# Altium PCB MASTER.PcbDoc (part 2 of 2)
Units mm, origin at the board's own origin, x right, y up, seen from the top; angles counter-clockwise.
Board outline 70.52 x 68.97 mm, 2 copper layers (Top Layer, Bottom Layer); 64 components, 45 nets, 230 pads, 58 vias.
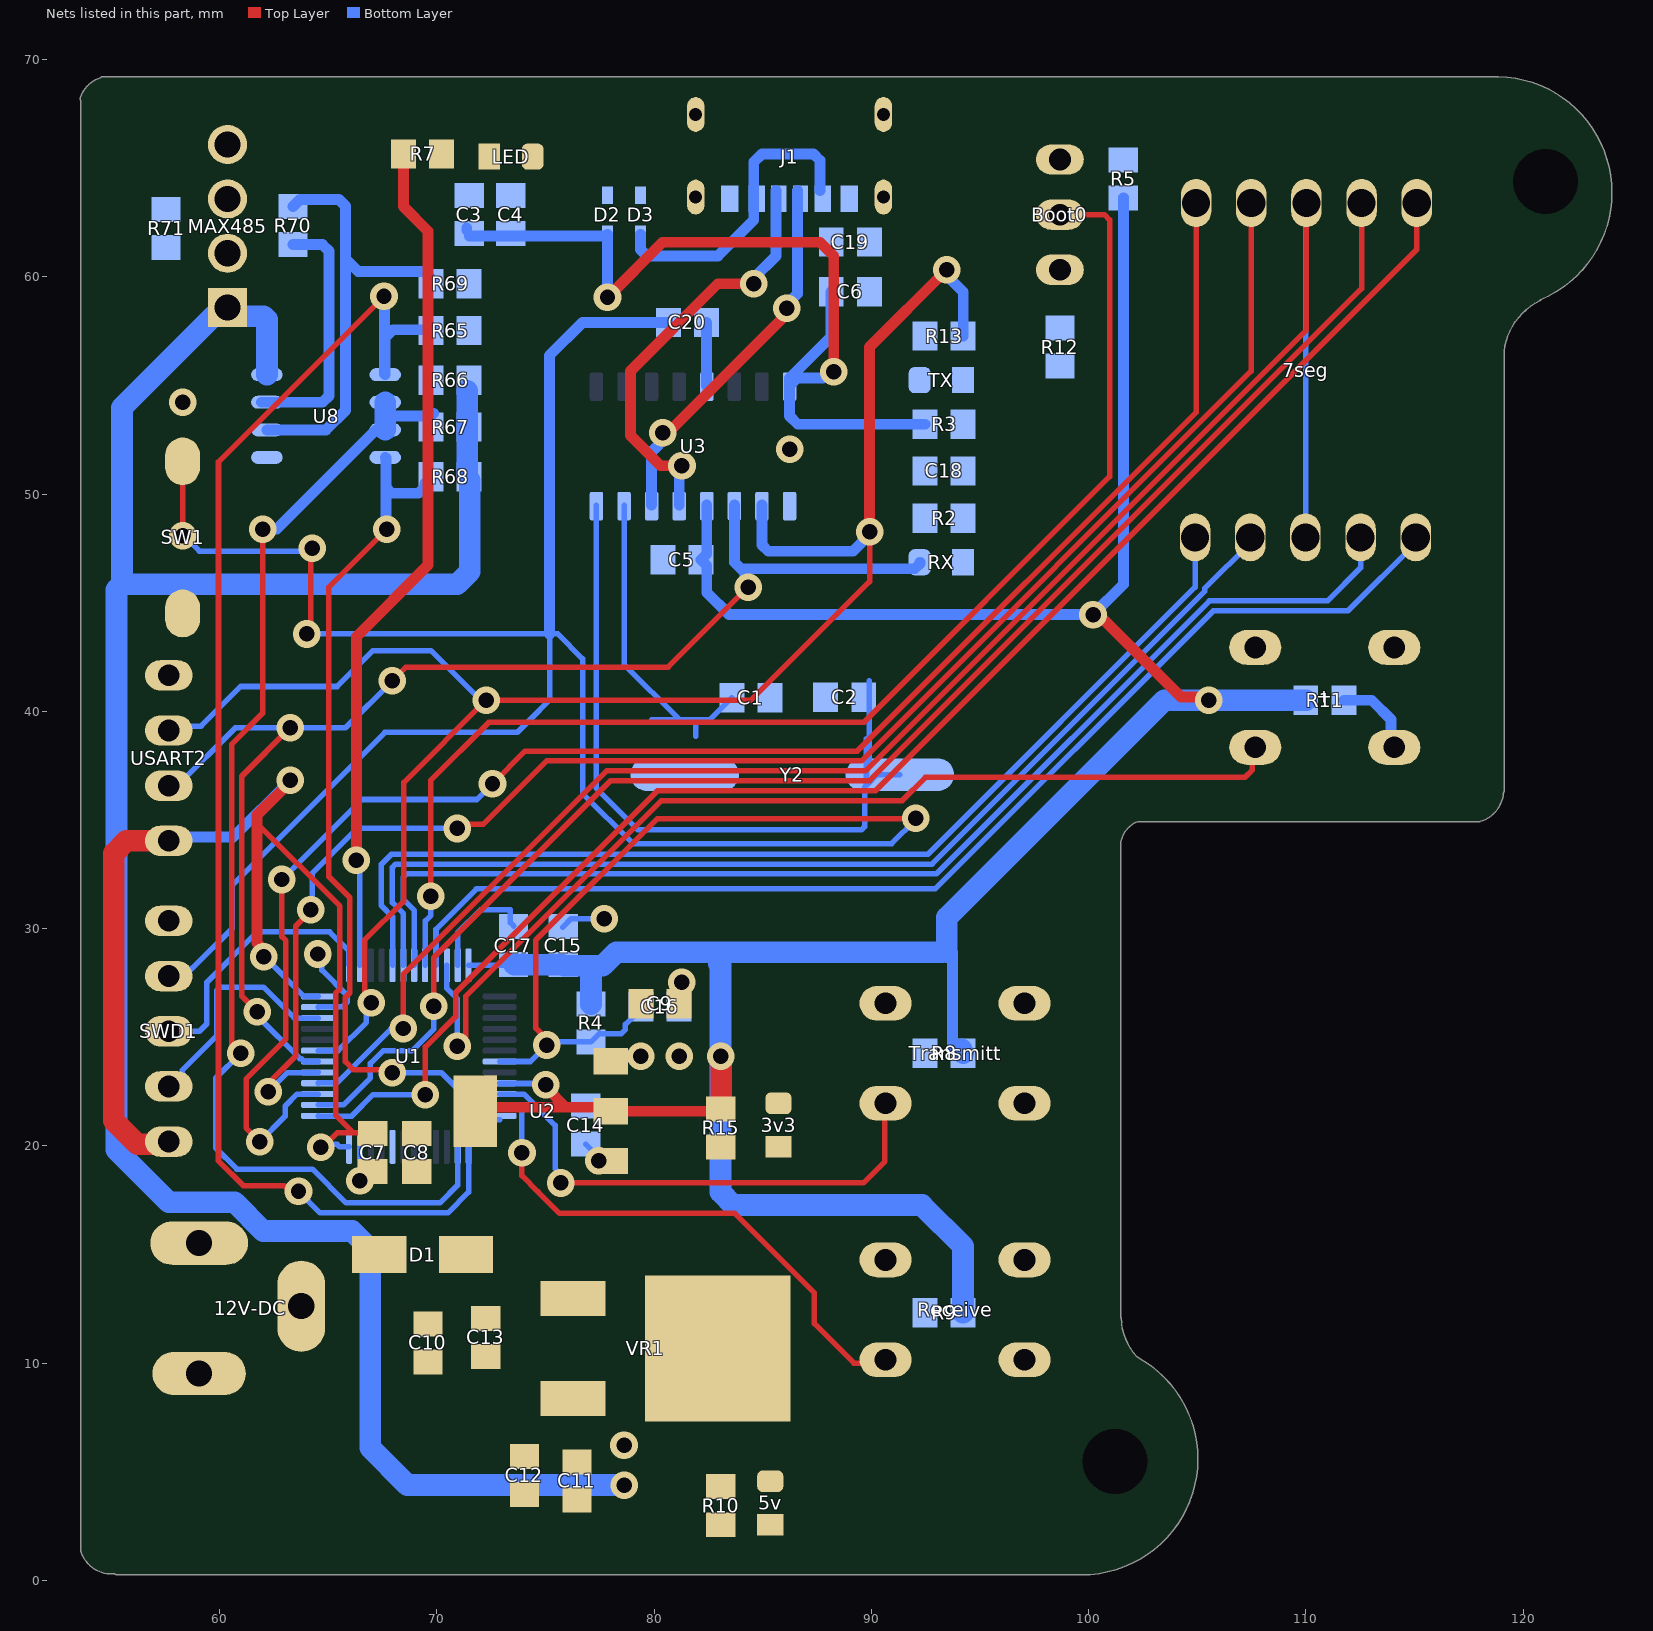
[diagram p2: the nets of this part, all layers, seen from the top]

## Part data
7seg: "file:///C:/Users/Tamana/Downloads/7SEG-12-19mm-GREEN-ANOD.pdf"
12V-DC: PartNumber=DC005-5.5MM
+ Receive Transmitt: "Tactile Switch SPST-NO Top Actuated Surface Mount", PartNumber="PTS645SH50SMTR92 LFS"
Boot0: library part HDR_1X3, "CONN, HEADER, Male, pitch: 2.54mm, 3POS"
C1 C2 C5 C6 C18 C19 C20: library part "Cap 0805", "SMT Capacitor"
C3 C4 C7 C8 C9 C10 C11 C12 C13 C14 C15 C16 C17: library part LD051C182KAB2A, "COMMERCIAL CHIP STD JAPAN BULK - FN TAPE/REEL, 7 INCH PAPER TAPE-0805", Package=None, Availability=Unavailable, MP=LD051C182KAB2A, Price=None
D1: library part "SS14 (SMD SMA)", "Diode Schottky 40V 1A Surface Mount SMA (DO-214AC)", PartNumber=SS14
D2 D3: library part "1N4148 (SMD)", "Diode Standard 75V 200mA Surface Mount SOD-523F", PartNumber=1N4148WT
J1: Package=None, Availability=Unavailable, MP=USB4125-GF-A_REVA2, Price=None
MAX485: library part 1881574, Package=None, Availability=Unavailable, MF="{'manufacturer': u'Phoenix Contact'}", MP=1881574, Price=None
R2 R3 R4 R5 R7 R8 R9 R10 R11 R12 R13 R15 R65 R66 R67 R68 R69 R70 R71: library part "Res 0805", "SMT Resistor"
SW1: "Tactile Switch SPST-NO Top Actuated Surface Mount", PartNumber=FSMSMTR-ND
SWD1: library part HDR_1X5, "CONN, HEADER, Male, pitch: 2.54mm, 5POS"
U1: "ARM® Cortex®-M3 STM32F1 Microcontroller IC 32-Bit 72MHz 64KB (64K x 8) FLASH 48-LQFP (7x7)", Package="LQFP-48 STMicroelectronics", Check_prices=https://www.snapeda.com/parts/STM32F103C8T6/STMicroelectronics/view-part/?ref=eda, MF=STMicroelectronics, MP=STM32F103C8T6, SnapEDA_Link=https://www.snapeda.com/parts/STM32F103C8T6/STMicroelectronics/view-part/?ref=snap
U2: library part "LD1117-3.3V (SMD SOT-223)", "Linear Voltage Regulator IC  1 Output  800mA SOT-223", PartNumber=LD1117S33CTR
U3: "USB Interface Integrated Circuit", Package=None, Availability="Not in stock", Check_prices=https://www.snapeda.com/parts/Ch340G/WCH/view-part/?ref=eda, MF=WCH, MP=Ch340G, Price=None, SnapEDA_Link=https://www.snapeda.com/parts/Ch340G/WCH/view-part/?ref=snap
U8: library part "ADM485 (SMD)", "RS485 Interface", PartNumber=ADM4853ARZ-REEL7
USART2: library part HDR_1X4, "CONN, HEADER, Male, pitch: 2.54mm, 4POS"
VR1: "Linear Voltage Regulator IC Positive Fixed 1 Output 500mA DPAK", Package="TO-252 STMicroelectronics", Availability="Not in stock", Check_prices=https://www.snapeda.com/parts/L78M12ABDT/STMicroelectronics/view-part/?ref=eda, MF=STMicroelectronics, MP=L78M12ABDT, Price=None, SnapEDA_Link=https://www.snapeda.com/parts/L78M12ABDT/STMicroelectronics/view-part/?ref=snap
Y2: library part "Crystal HC-49S SMD 8MHz", "SMT Crystal", PartNumber=ABLS-8.000MHZ-K4T

## Free pads (board coordinates)
  round 1.524 hole 3: 9(101.219,5.466) 9(121.031,64.394)

## Via types
v1: diameter 1.27, hole 0.711, Top Layer to Bottom Layer, 58 vias

## Nets (pads, with @x,y where several pads share a name; then routed paths per layer and width w, separated by ;. In a path a pad name is that pad's centre, name@x,y a point inside that pad or via, vN(x,y) a via of type N, cw(c..) or ccw(c..) an arc to the next point about the centre after c; other vN are vias at no path point)
3v3: C5.2 C7.2 C8.2 C14.2 C15.2 C17.2 R4.2 R5.1 R8.2 R9.2 R11.2 R15.1 SWD1.1 U1.9 U1.24 U1.36 U1.48 U2.2 U2.4 U3.4 USART2.1 | length 203.8
  Top Layer w0.254: 61.722,34.843 65.532,31.033 65.532,27.23 65.332,27.03 65.332,21.414 66.139,20.607 ; v1(64.643,19.944) 64.753,19.944 65.417,20.607 66.139,20.607 ; C7.2@67.046,20.565 67.004,20.607 66.139,20.607 ; U2.4@71.247,21.849 71.247,21.941 U2.4@72.12,22.814
  Top Layer w0.5: v1(62.03,28.707) 62.03,29.034 61.722,29.342 61.722,34.843 61.722,35.23 63.246,36.754 v1(63.246,36.835) ; U2.4@71.755,21.595 71.938,21.779 75.932,21.779 ; v1(75.006,22.814) 75.006,22.705 75.932,21.779 ; U2.2@78.003,21.595 82.945,21.595 R15.1@83.058,21.708 R15.1@82.987,21.779 ; U2.2@78.003,21.779 75.932,21.779 ; v1(100.203,44.455) 100.457,44.455 104.247,40.665 105.39,40.665 v1(105.537,40.518)
  Top Layer w1: SWD1.1@57.587,20.122 57.299,20.122 57.248,20.071 56.212,20.071 55.118,21.165 55.118,33.455 55.704,34.041 USART2.1@57.658,34.041 ; R15.1@83.058,21.708 83.09,21.74 83.09,24.098 v1(83.058,24.13)
  Bottom Layer w0.254: v1(62.03,28.707) 62.065,28.707 63.887,26.885 U1.36@64.527,26.885 ; v1(64.643,19.944) 64.77,20.071 65.405,20.071 65.521,19.955 U1.24@65.957,19.955 ; U1.48@71.457,28.315 73.491,28.315 C17.2@73.543,28.367 ; U1.9@72.887,22.885 72.9,22.872 74.948,22.872 v1(75.006,22.814) 76.098,21.722 76.845,21.722 76.958,21.722 C14.2@76.845,21.835
  Bottom Layer w0.5: USART2.1@58.293,34.041 58.465,34.213 60.624,34.213 v1(63.246,36.835) ; U3.4@82.423,49.496 82.423,47.253 C5.2@82.155,46.985 82.423,46.717 82.423,45.471 83.439,44.455 v1(100.203,44.455) 101.6,45.852 R5.1@101.6,63.646 ; 93.726,28.915 93.726,24.473 R8.2@93.762,24.437
  Bottom Layer w1: C17.2@73.543,28.367 73.57,28.34 75.761,28.34 C15.2@75.788,28.313 ; C15.2@75.857,28.288 77.089,28.288 ; R4.2@77.089,26.534 77.089,28.288 ; 82.987,28.39 83.058,28.318 v1(83.058,24.13) 83.058,17.863 83.644,17.277 92.329,17.277 94.22,15.386 R9.2@94.22,12.324 ; 93.238,28.915 78.249,28.915 77.622,28.288 77.089,28.288 ; 93.473,28.915 93.473,30.512 103.478,40.518 v1(105.537,40.518) R11.2@110.01,40.518 ; R8.2@94.159,24.437 94.159,24.337 R8.2@94.234,24.262
+12: C10.2 C13.2 D1.2 VR1.1
a: 7seg.7 U1.43 | length 55.6
  Bottom Layer w0.254: U1.43@68.957,28.315 68.957,30.83 68.453,31.334 68.453,32.368 68.602,32.517 92.985,32.517 105.558,45.09 110.998,45.09 112.522,46.614 7seg.7@112.522,48.011
b: 7seg.6 U1.45 | length 54.4
  Bottom Layer w0.254: U1.45@69.957,28.315 69.957,29.964 71.821,31.828 92.938,31.828 105.746,44.636 111.937,44.636 115.062,47.761 7seg.6@115.062,48.011
Boot0: Boot0.2 U1.44 | length 59.9
  Top Layer w0.254: v1(69.723,31.501) 69.723,36.835 72.39,39.502 89.662,39.502 100.965,50.805 100.965,62.627 100.722,62.87 Boot0.2@98.679,62.87
  Bottom Layer w0.254: U1.44@69.457,28.315 69.47,28.328 69.47,30.359 69.723,30.612 v1(69.723,31.501)
Boot1: U1.20
c: 7seg.4 U1.26 | length 69.9
  Top Layer w0.254: v1(69.85,26.421) 69.85,28.66 78.002,36.812 89.914,36.812 112.566,59.464 7seg.4@112.566,63.406
  Bottom Layer w0.254: U1.26@64.527,21.885 65.695,21.885 66.936,23.126 66.936,23.794 67.531,24.389 68.032,24.389 68.874,24.389 69.85,25.365 v1(69.85,26.421)
com: 7seg.3 7seg.8 U1.28 | length 82.6
  Top Layer w0.254: v1(68.453,25.405) 68.453,27.905 77.814,37.266 89.726,37.266 110.026,57.566 7seg.3@110.026,63.406
  Bottom Layer w0.254: U1.28@64.527,22.885 64.54,22.898 65.389,22.898 65.509,23.018 65.518,23.018 67.905,25.405 v1(68.453,25.405) ; 7seg.8@109.982,48.011 110.004,48.033 110.004,63.384 7seg.3@110.026,63.406
d: 7seg.2 U1.29 | length 74.1
  Top Layer w0.254: v1(62.23,22.484) 62.23,22.865 63.5,24.135 63.5,30.118 64.189,30.807 v1(64.189,30.866) ; v1(70.929,34.613) 71.12,34.803 72.129,34.803 75.046,37.72 89.538,37.72 107.486,55.668 7seg.2@107.486,63.406
  Bottom Layer w0.254: v1(62.23,22.484) 63.123,23.377 64.519,23.377 U1.29@64.527,23.385 ; v1(64.189,30.866) 64.262,30.939 64.262,32.557 66.318,34.613 v1(70.929,34.613)
D+: J1.A5 U3.5 | length 19.8
  Top Layer w0.5: v1(81.28,51.313) 80.299,51.313 78.911,52.701 78.911,55.67 82.931,59.69 v1(84.582,59.69)
  Bottom Layer w0.5: U3.5@81.153,49.496 81.153,51.186 v1(81.28,51.313) ; v1(84.582,59.69) 84.582,59.949 85.606,60.973 J1.A5@85.606,63.981
D-: J1.B5 U3.6 | length 17.3
  Top Layer w0.5: v1(80.391,52.832) 80.64,52.832 80.645,52.837 86.106,58.298 v1(86.106,58.552)
  Bottom Layer w0.5: U3.6@79.883,49.496 79.883,51.948 v1@80.579,52.644 ; v1(86.106,58.552) 86.106,58.73 86.606,59.23 J1.B5@86.606,63.981
DP: 7seg.5 U1.25 | length 71.2
  Top Layer w0.254: v1(69.469,22.357) 69.469,24.556 70.866,25.953 70.866,27.07 80.144,36.348 90.191,36.348 115.106,61.263 7seg.5@115.106,63.406
  Bottom Layer w0.254: U1.25@64.527,21.385 64.537,21.375 66.079,21.375 67.061,22.357 v1(69.469,22.357)
e: 7seg.1 U1.27 | length 77.6
  Top Layer w0.254: v1(61.849,20.198) 61.214,20.833 61.214,23.079 63.046,24.911 63.046,29.455 62.865,29.636 v1(62.865,32.263) ; v1(72.557,36.668) 74.063,38.174 89.35,38.174 104.946,53.77 7seg.1@104.946,63.406
  Bottom Layer w0.254: v1(61.849,20.198) 63.017,21.366 63.017,21.834 63.568,22.385 U1.27@64.527,22.385 ; v1(62.865,32.263) 66.548,35.946 71.835,35.946 v1(72.557,36.668)
f: 7seg.9 U1.42 | length 50.7
  Bottom Layer w0.254: U1.42@68.457,28.315 68.457,30.688 67.945,31.2 67.945,32.822 68.094,32.971 92.79,32.971 105.356,45.537 105.356,45.675 107.442,47.761 7seg.9@107.442,48.011
g: 7seg.10 U1.41 | length 49.9
  Bottom Layer w0.254: U1.41@67.957,28.315 67.957,30.546 67.437,31.066 67.437,32.956 67.906,33.425 92.602,33.425 104.902,45.725 7seg.10@104.902,48.011
GND: 3v3.2 5v.2 12V-DC.2 12V-DC.3 +.2 +.3 C1.2 C2.2 C3.1 C4.1 C5.1 C6.1 C7.1 C8.1 C9.1 C10.1 C11.1 C12.1 C13.1 C14.1 C15.1 C16.2 C17.1 C18.1 C19.1 J1.A12 J1.B12 J1.S1 J1.S2 J1.S3 J1.S4 LED.2 MAX485.04 R12.1 R71.1 Receive.2 Receive.3 SW1.1 SWD1.5 Transmitt.2 Transmitt.3 U1.23 U1.35 U1.47 U2.1 U3.1 U8.5 USART2.4 VR1.2 | length 15.4
  Bottom Layer w0.254: v1(64.516,28.834) 64.7,28.651 64.7,28.089 65.872,26.917 65.872,26.633 65.637,26.398 64.54,26.398 U1.35@64.527,26.385 ; v1(66.457,18.388) U1.23@66.457,19.955 ; U1.47@70.957,28.315 70.957,29.814 72.009,30.866 73.384,30.866 73.384,30.276 C17.1@73.543,30.117 ; C15.1@75.788,30.063 76.183,30.458 v1(77.703,30.458) ; C14.1@76.845,20.085 77.451,19.479 v1(77.451,19.309) ; C16.2@81.139,26.411 81.261,26.533 v1(81.261,27.526) ; v1@86.106,52.197 v1(86.233,52.07)
  other v1: 58.293,54.234
INC: +.1 +.4 R11.1 U1.46 | length 51.9
  Top Layer w0.254: v1(70.929,24.58) 71.32,24.97 71.32,26.882 80.332,35.894 91.421,35.894 92.489,36.962 107.188,36.962 107.539,37.313 107.539,38.213 +.4@107.671,38.345
  Bottom Layer w0.254: U1.46@70.457,28.315 70.457,27.251 70.929,26.778 v1(70.929,24.58)
  Bottom Layer w0.5: R11.1@111.76,40.518 113.03,40.518 113.919,39.629 113.919,38.497 +.1@114.071,38.345
LED: R7.1 U1.38 | length 39.3
  Top Layer w0.5: v1(66.294,33.152) 66.294,43.439 69.596,46.741 69.596,62.108 68.467,63.237 R7.1@68.467,65.664
  Bottom Layer w0.254: v1(66.294,33.152) 66.444,33.002 66.444,28.328 U1.38@66.457,28.315
Net3v3_1: 3v3.1 R15.2
Net5v_1: 5v.1 R10.2
Net12V-DC_1: 12V-DC.1 D1.1
NetBoot0_1: Boot0.1 R5.2
NetBoot0_3: Boot0.3 R12.2
NetC3_2: C3.2 C4.2 C6.2 C9.2 C11.2 C12.2 C18.2 C19.2 D2.2 MAX485.01 R2.1 R3.1 R10.1 R65.2 R66.2 R67.2 R68.2 R69.2 U2.3 U3.16 U8.8 VR1.3 | length 145.8
  Top Layer w0.5: v1(77.851,59.06) 80.391,61.6 87.63,61.6 88.265,60.965 v1(88.265,55.631)
  Bottom Layer w0.5: C3.2@71.37,62.159 C3.2@71.37,62.259 ; C3.2@71.487,61.891 D2.2@77.851,61.891 ; v1(77.851,59.06) D2.2@77.851,61.891 ; D2.2@77.851,61.97 D2.2@77.851,61.891 ; U3.16@86.346,55.109 86.579,55.342 87.767,55.342 88.057,55.631 v1(88.265,55.631) ; C6.2@88.152,59.324 88.138,59.31 88.138,57.246 86.233,55.341 86.233,53.599 86.614,53.218 R3.1@92.47,53.218
  Bottom Layer w1: MAX485.01@59.751,58.232 55.499,53.98 55.499,45.852 ; MAX485.01@60.325,58.632 60.325,58.63 MAX485.01@60.362,58.593 60.762,58.193 62.025,58.193 62.172,58.046 U8.8@62.172,55.504 ; R68.2@71.395,50.908 71.398,50.911 71.398,53.315 71.395,53.318 R66.2@71.395,54.756 ; R68.2@71.512,50.64 71.512,46.438 70.926,45.852 55.499,45.852 ; v1(78.625,4.385) 68.645,4.385 66.929,6.101 66.929,15.245 66.095,16.08 62.009,16.08 60.685,17.404 57.658,17.404 55.245,19.817 55.245,45.598 55.499,45.852
  other v1: 78.613,6.228 79.375,24.135 81.153,24.135
NetC20_2: C20.2 U3.13 | length 2.9
  Bottom Layer w0.5: C20.2@82.409,57.907 82.416,57.9 82.416,55.003 U3.13@82.423,54.996
NetD2_1: D2.1 D3.2
NetD3_1: D3.1 J1.A9 J1.B9 | length 14.1
  Bottom Layer w0.5: D3.1@79.375,61.97 79.375,61.258 79.668,60.965 82.931,60.965 84.586,62.62 84.586,63.981 84.586,65.287 84.963,65.664 87.333,65.664 87.626,65.371 J1.A9@87.626,63.981
NetLED_1: LED.1 R7.2
NetMAX485_02: MAX485.02 R70.1 R71.2 U8.7 | length 11.7
  Bottom Layer w0.5: U8.7@61.918,54.234 64.739,54.234 65.032,54.527 65.032,61.194 64.739,61.487 R70.1@63.373,61.487
NetMAX485_03: MAX485.03 R69.1 R70.2 U8.6 | length 20.5
  Bottom Layer w0.5: U8.6@62.172,52.964 64.897,52.964 65.786,53.853 65.786,60.838 ; R70.2@63.373,63.237 63.698,63.562 65.493,63.562 65.786,63.269 65.786,60.838 ; R69.1@69.737,59.822 69.737,59.922 69.412,60.247 66.377,60.247 65.786,60.838
NetR2_2: R2.2 RX.1
NetR3_2: R3.2 TX.1
NetR13_1: R13.1 TX.2
NetR13_2: R13.2 U1.31 U3.2 USART2.3 | length 83.8
  Top Layer w0.254: v1(66.982,26.586) 66.824,26.586 66.675,26.735 66.675,29.469 68.475,31.269 68.475,32.737 68.475,36.73 v1(72.263,40.518) 84.455,40.518 89.916,45.979 v1(89.916,48.265)
  Top Layer w0.5: v1(89.916,48.265) 89.916,56.774 v1(93.472,60.33)
  Bottom Layer w0.254: USART2.3@57.658,39.121 57.864,39.327 59.139,39.327 60.96,41.148 65.405,41.148 67.056,42.799 69.723,42.799 72.004,40.518 v1(72.263,40.518) ; U1.31@64.527,24.385 65.448,24.385 66.748,25.685 66.748,26.367 66.802,26.421 66.817,26.421 v1(66.982,26.586)
  Bottom Layer w0.5: U3.2@84.963,49.496 84.963,47.669 85.256,47.376 89.154,47.376 89.916,48.138 v1(89.916,48.265) ; v1(93.472,60.33) 93.472,60.062 94.227,59.307 94.227,57.289 R13.2@94.22,57.282
NetR65_1: R65.1 U1.13 U8.1 | length 65.6
  Top Layer w0.254: v1(63.627,17.912) 63.433,18.107 63.03,18.107 62.97,18.166 61.087,18.166 59.944,19.309 59.944,51.488 v1(67.564,59.108)
  Bottom Layer w0.254: v1(63.627,17.912) 64.621,16.918 70.507,16.918 71.457,17.868 U1.13@71.457,19.955
  Bottom Layer w0.5: v1(67.564,59.108) 67.593,59.079 67.593,55.533 U8.1@67.622,55.504 67.622,57.213 67.979,57.57 R65.1@69.765,57.57
NetR66_1: R66.1 R67.1 U1.14 U8.2 U8.3 | length 55.1
  Top Layer w0.254: v1(60.96,24.262) 60.56,24.662 60.56,38.5 61.976,39.916 v1(61.976,48.392)
  Bottom Layer w0.254: v1(60.96,24.262) 59.817,23.119 59.817,19.904 60.793,18.928 64.262,18.928 65.818,17.372 70.141,17.372 70.957,18.188 U1.14@70.957,19.955
  Bottom Layer w0.5: v1(61.976,48.392) 62.625,48.392 67.197,52.964 U8.3@67.622,52.964 ; 67.622,53.599 69.723,53.599 R67.1@69.85,53.726
  Bottom Layer w1: U8.3@67.622,52.964 67.622,53.599 U8.2@67.622,54.234
NetR68_1: R68.1 U1.12 U8.4 | length 40.3
  Top Layer w0.254: v1(67.691,48.392) 65.024,45.725 65.024,32.39 65.986,31.428 65.986,27.042 65.786,26.842 65.786,23.881 66.167,23.5 67.825,23.5 v1(67.952,23.373)
  Bottom Layer w0.254: v1(67.952,23.373) 70.199,23.373 72.217,21.355 72.358,21.214 72.887,21.214
  Bottom Layer w0.5: U8.4@67.622,51.694 67.657,51.66 67.657,50.302 ; v1(67.691,48.392) 67.657,48.427 67.657,50.302 ; R68.1@69.765,50.815 69.44,50.49 69.44,50.336 69.147,50.043 67.915,50.043 67.657,50.302
NetRX_2: RX.2 U1.30 U3.3 USART2.2 | length 68.9
  Top Layer w0.254: v1(61.722,26.167) 61.722,26.188 61.014,26.896 61.014,37.016 v1(63.246,39.248) ; v1(67.945,41.407) 68.575,42.037 80.64,42.037 v1(84.328,45.725)
  Bottom Layer w0.254: USART2.2@57.658,36.581 58.058,36.581 60.725,39.248 v1(63.246,39.248) 65.786,39.248 v1(67.945,41.407) ; v1(61.722,26.167) 61.722,25.99 63.694,24.018 63.754,24.018 63.887,23.885 U1.30@64.527,23.885
  Bottom Layer w0.5: U3.3@83.693,49.496 83.693,46.868 83.994,46.567 ; 84.181,46.567 RX.2@91.996,46.567 ; v1(84.328,45.725) 84.181,45.872 84.181,46.38 83.994,46.567 ; RX.2@92.246,46.868 92.246,46.817 RX.2@91.996,46.567 ; 83.994,46.567 RX.2@91.996,46.567
NRST: C16.1 C20.1 R4.1 SW1.2 SWD1.4 U1.7 | length 128
  Top Layer w0.254: v1(58.293,48.082) SW1.2@58.293,51.511 ; v1(64.008,43.566) 64.157,43.715 64.198,43.715 64.198,47.44 v1(64.262,47.503) ; v1(75.057,24.643) 75.057,24.918 74.549,25.426 74.549,29.469 80.137,35.057 92.021,35.057 v1(92.048,35.084)
  Bottom Layer w0.254: SWD1.4@57.658,27.818 58.368,27.818 58.719,28.169 58.728,28.169 60.579,30.019 60.579,32.009 67.602,39.032 73.698,39.032 74.295,39.629 75.184,40.518 75.184,43.566 ; v1(58.293,48.082) 58.353,48.082 59.059,47.376 64.135,47.376 v1(64.262,47.503) ; v1(64.008,43.566) 75.184,43.566 ; U1.7@72.887,23.885 74.299,23.885 v1(75.057,24.643) ; v1@75.579,24.784 R4.1@77.089,24.784 77.475,25.17 78.491,25.17 78.671,25.35 78.671,25.593 79.389,26.311 C16.1@79.389,26.411 ; v1(92.048,35.084) 92.048,35.03 90.932,33.914 79.016,33.914 76.708,36.222 76.708,42.423 75.565,43.566 75.184,43.566
  Bottom Layer w0.5: 75.184,43.566 75.184,56.393 76.698,57.907 C20.1@80.659,57.907
Receiver: R9.1 Receive.1 Receive.4 U1.11 | length 25.4
  Top Layer w0.254: v1(73.914,19.69) 73.914,18.634 74.662,17.886 75.652,16.896 83.716,16.896 87.376,13.236 87.376,11.816 89.196,9.996 90.459,9.996 Receive.4@90.628,10.165
  Bottom Layer w0.254: U1.11@72.887,21.885 72.9,21.872 73.869,21.872 73.914,21.827 v1(73.914,19.69)
SWCLK: SWD1.3 U1.37 | length 12.3
  Bottom Layer w0.254: SWD1.3@57.658,25.278 59.06,25.278 59.403,25.621 59.403,27.531 61.722,29.85 65.062,29.85 65.944,28.968 65.944,28.328 U1.37@65.957,28.315
SWDIO: SWD1.2 U1.34 | length 10.7
  Bottom Layer w0.254: SWD1.2@57.658,22.738 57.748,22.738 58.277,23.268 58.277,23.484 59.857,25.064 59.857,27.161 60.006,27.31 62.016,27.31 63.441,25.885 U1.34@64.527,25.885
Transmitt: R8.1 Transmitt.1 Transmitt.4 U1.10 | length 23.9
  Top Layer w0.254: v1(75.692,18.293) 89.634,18.293 90.623,19.283 90.623,21.943 Transmitt.4@90.628,21.948
  Bottom Layer w0.254: U1.10@72.887,22.385 73.998,22.385 75.438,20.945 75.438,18.95 75.498,18.89 75.498,18.488 v1(75.692,18.293)
XI: C1.1 U3.7 Y2.2 | length 15.8
  Bottom Layer w0.254: U3.7@78.613,49.496 78.613,42.169 81.163,39.619 81.21,39.619 ; 79.893,39.619 81.21,39.619 ; 81.915,38.867 81.915,39.619 ; C1.1@83.58,40.635 82.564,39.619 81.915,39.619 ; 81.21,39.619 81.543,39.619 81.915,39.619
XO: C2.1 U3.8 Y2.1 | length 35.6
  Bottom Layer w0.254: U3.8@77.343,49.496 77.343,36.454 79.248,34.549 89.541,34.549 89.69,34.698 89.69,36.514 89.841,36.664 90.266,37.089 Y2.1@91.313,37.089 ; Y2.1@89.775,36.73 89.775,37.724 89.775,38.74 ; Y2.1@89.902,37.724 89.902,38.74 89.902,40.655 89.902,41.417
pads on no net: U1.1 U1.2 U1.3 U1.4 U1.5 U1.6 U1.8 U1.15 U1.16 U1.17 U1.18 U1.19 U1.21 U1.22 U1.32 U1.33 U1.39 U1.40 U3.9 U3.10 U3.11 U3.12 U3.14 U3.15
copper on no net: | length 0.4
  Bottom Layer w0.254: v1@87.884,48.392 v1(87.884,48.773)

## Polygon pours and split planes (outlines as drawn)
GND on Bottom Layer "GND_L02_P007" (solid, remove dead copper, pour order 7): 55.156,0.302 cw(c55.012,1.763) 53.598,1.368 cw(c53.721,1.402) 53.594,1.404 53.594,68.138 cw(c53.697,68.213) 53.576,68.254 cw(c54.963,67.775) 54.509,69.171 cw(c54.61,69.093) 54.61,69.221 118.745,69.221 cw(c118.745,69.093) 118.805,69.206 cw(c118.864,69.093) 118.867,69.221 cw(c118.755,63.884) 124.093,63.884 cw(c118.755,63.884) 120.815,58.96 cw(c120.701,59.015) 120.757,58.901 ccw(c122.087,56.234) 119.126,56.575 119.126,36.327 cw(c118.999,36.327) 119.093,36.242 cw(c117.63,36.348) 118.025,34.934 cw(c117.99,35.057) 117.99,34.93 cw(c117.99,35.057) 117.99,34.93 102.279,34.93 ccw(c102.686,33.787) 101.473,33.787 ccw(c102.686,33.787) 101.483,33.632 cw(c101.357,33.616) 101.484,33.616 cw(c101.357,33.616) 101.473,33.564 101.473,12.138 cw(c101.365,12.071) 101.492,12.077 ccw(c104.362,12.206) 102.225,10.286 cw(c99.694,5.589) 105.03,5.589 cw(c99.694,5.589) 99.684,0.254 cw(c99.684,0.381) 99.631,0.266 55.245,0.266 cw(c55.245,0.393)
GND on Top Layer "GND_L01_P006" (solid, remove dead copper, pour order 6): 55.156,0.302 cw(c55.012,1.763) 53.598,1.368 cw(c53.721,1.402) 53.594,1.404 53.594,68.138 cw(c53.697,68.213) 53.576,68.254 cw(c54.963,67.775) 54.509,69.171 cw(c54.61,69.093) 54.61,69.221 118.745,69.221 cw(c118.745,69.093) 118.805,69.206 cw(c118.864,69.093) 118.867,69.221 cw(c118.755,63.884) 124.093,63.884 cw(c118.755,63.884) 120.815,58.96 cw(c120.701,59.015) 120.757,58.901 ccw(c122.087,56.234) 119.126,56.575 119.126,36.327 cw(c118.999,36.327) 119.093,36.242 cw(c117.63,36.348) 118.025,34.934 cw(c117.99,35.057) 117.99,34.93 cw(c117.99,35.057) 117.99,34.93 102.279,34.93 ccw(c102.686,33.787) 101.473,33.787 ccw(c102.686,33.787) 101.483,33.632 cw(c101.357,33.616) 101.484,33.616 cw(c101.357,33.616) 101.473,33.564 101.473,12.138 cw(c101.365,12.071) 101.492,12.077 ccw(c104.362,12.206) 102.225,10.286 cw(c99.694,5.589) 105.03,5.589 cw(c99.694,5.589) 99.684,0.254 cw(c99.684,0.381) 99.631,0.266 55.245,0.266 cw(c55.245,0.393)

## Keep-outs
Keep-Out Layer:
  lines w0.254: 53.697,68.213 cw(c54.963,67.775) 54.603,69.066 ; 53.721,68.204 53.721,1.402 ccw(c55.012,1.763) 55.183,0.434 ; 54.61,69.093 118.745,69.093 ; 55.245,0.393 99.694,0.393 ; 99.684,0.381 ccw(c99.694,5.589) 102.139,10.188 ; 101.346,12.07 101.346,33.787 ; 101.357,33.616 cw(c102.686,33.787) 102.258,35.057 ; 101.365,12.071 ccw(c104.362,12.206) 102.328,10.001 ; 102.235,35.057 117.99,35.057 ccw(c117.63,36.348) 118.959,36.519 ; 118.864,69.093 cw(c118.755,63.884) 120.537,58.988 ; 118.999,36.327 118.999,56.774 ; 118.999,55.885 cw(c122.087,56.234) 120.701,59.015

## Other copper
Top Layer:
  rectangle net NetC3_2: 77.978,3.561 83.82,6.482
  rectangle net Net5v_1: 82.296,2.037 86.144,3.061
  rectangle net 3v3: 66.294,20.071 72.136,20.96
  rectangle net NetLED_1: 69.977,65.029 72.898,66.045
  rectangle net +12: 68.834,11.308 73.025,12.578
  rectangle net Net12V-DC_1: 56.515,15.245 68.58,16.642
  rectangle net Net3v3_1: 82.385,19.555 86.233,20.452
  rectangle net NetC3_2: 76.835,23.246 81.788,24.643
  rectangle net NetC3_2: 78.867,23.754 80.01,27.31
  rectangle net NetC3_2: 73.279,5.085 79.121,9.149
  rectangle net NetC3_2: 70.485,5.085 74.422,7.498
  rectangle net 3v3: 82.296,21.468 83.947,29.142
  rectangle net +12: 69.977,11.308 77.851,15.753
  pour cut-out: 60.452,19.055 63.246,19.055 63.246,21.087 63.246,23.119 60.96,23.119 60.452,23.119
Bottom Layer:
  rectangle net Receiver: 90.932,9.53 97.028,10.927
  rectangle net NetMAX485_02: 56.642,60.33 64.135,61.981
  rectangle net NetD2_1: 77.597,63.505 79.629,64.267
  rectangle net NetBoot0_1: 97.536,64.775 102.362,66.172
  rectangle: 89.789,7.244 95.885,8.641
  rectangle net Receiver: 89.662,9.403 92.456,12.959
  rectangle net Transmitt: 90.805,21.087 96.901,22.484
  rectangle net NetC3_2: 91.821,48.392 93.091,53.853
  rectangle net NetBoot0_3: 97.79,57.155 99.568,61.092
  rectangle net NetC3_2: 87.63,58.679 88.646,61.976
  rectangle net XO: 89.154,36.708 93.726,41.661
  rectangle net Transmitt: 89.662,21.341 92.456,24.897
  rectangle net XI: 79.121,36.835 83.566,41.661
  rectangle net NetMAX485_03: 59.309,62.743 64.135,64.521
  rectangle net NetC3_2: 70.993,46.233 72.009,62.743
  rectangle net NetR3_2: 93.599,52.456 94.742,55.758
  rectangle net NetR2_2: 93.726,46.36 94.742,49.662
  rectangle net NetR13_1: 91.821,54.742 92.964,57.917
  rectangle net NetR66_1: 69.088,52.456 70.485,55.885
  rectangle net NetC3_2: 78.486,3.561 81.915,24.643
  rectangle net INC: 106.553,37.343 115.062,38.994
  pour cut-out: 78.486,25.532 82.042,25.532 82.042,23.373 78.486,23.373
  pour cut-out: 82.423,53.932 82.423,50.424 85.725,50.424 85.725,53.932
  pour cut-out: 79.057,48.011 79.184,48.011 81.852,48.011 81.852,48.519 79.057,48.519
  pour cut-out: 78.232,60.965 87.63,60.965 87.63,57.663 85.852,55.885 78.232,55.885

## Silkscreen, mask and mechanical layers (free items; w line width, h text height)
Top Overlay:
  circle w0.254: c101.219,5.466 r1.8
  circle w0.254: c121.031,64.394 r1.8
  lines w0.254: 96.5,57.658 96.5,67.73 ; 53.975,0.64 88.265,0.64 88.265,17.277 53.975,17.277 53.975,0.64 ; 65.532,17.78 88.265,17.78 88.265,28.326 65.532,28.326 65.532,17.78
  text "GND" at 55.768,64.868 h1.52 r90
  text "p-up" at 96.05,64.848 h1.52 r90
  text "A" at 55.768,62.997 h1.52 r90
  text "B" at 55.768,60.696 h1.52 r90
  text "p-dn" at 96.154,57.631 h1.5 r90
  text "+5V" at 55.768,57.491 h1.52 r90
  text "Reset" at 55.768,46.341 h1.52 r90
  text "3.3V-DC" at 82.538,26.533 h1.52
  text "5V-DC" at 83.685,15.103 h1.52
Bottom Overlay:
  lines w0.254: 53.848,49.789 75.819,49.789 75.819,68.712 53.848,68.712 53.848,49.789 ; 76.581,33.533 96.647,33.533 96.647,68.585 76.581,68.585 76.581,33.533
  text "CH340G" at 95.392,67.774 h1.52 r90
  text "MAX485" at 60.531,50.282 h1.52
  text "GND" at 55.895,43.357 h1.52 r90
  text "RX" at 55.895,40.062 h1.52 r90
  text "TX" at 55.895,37.068 h1.52 r90
  text "3v3" at 55.895,34.737 h1.52 r90
  text "GND" at 55.895,31.8 h1.52 r90
  text "CLK" at 55.895,28.29 h1.52 r90
  text "DIO" at 55.895,24.972 h1.52 r90
  text "3v3" at 55.895,21.656 h1.52 r90
  text "STM32f103C8T6" at 75.057,15.875 h1.52
  text "Tamana Amraji" at 95.377,3.838 h1.52
  text "2025" at 57.635,2.198 h1.52
  text "tamana.amraji@gmail.com" at 95.121,2.079 h1.52